# Altium PCB PCB_Hall_15mm.PcbDoc
Units mm, origin at the board's own origin, x right, y up, seen from the top; angles counter-clockwise.
Board outline 18.25 x 45 mm, 4 copper layers (Top Layer, Signal Layer 1, Signal Layer 2, Bottom Layer), stack 0.778 mm thick; 11 components, 15 nets, 63 pads, 13 vias.
Unrouted connection lines stored in the file: 22.
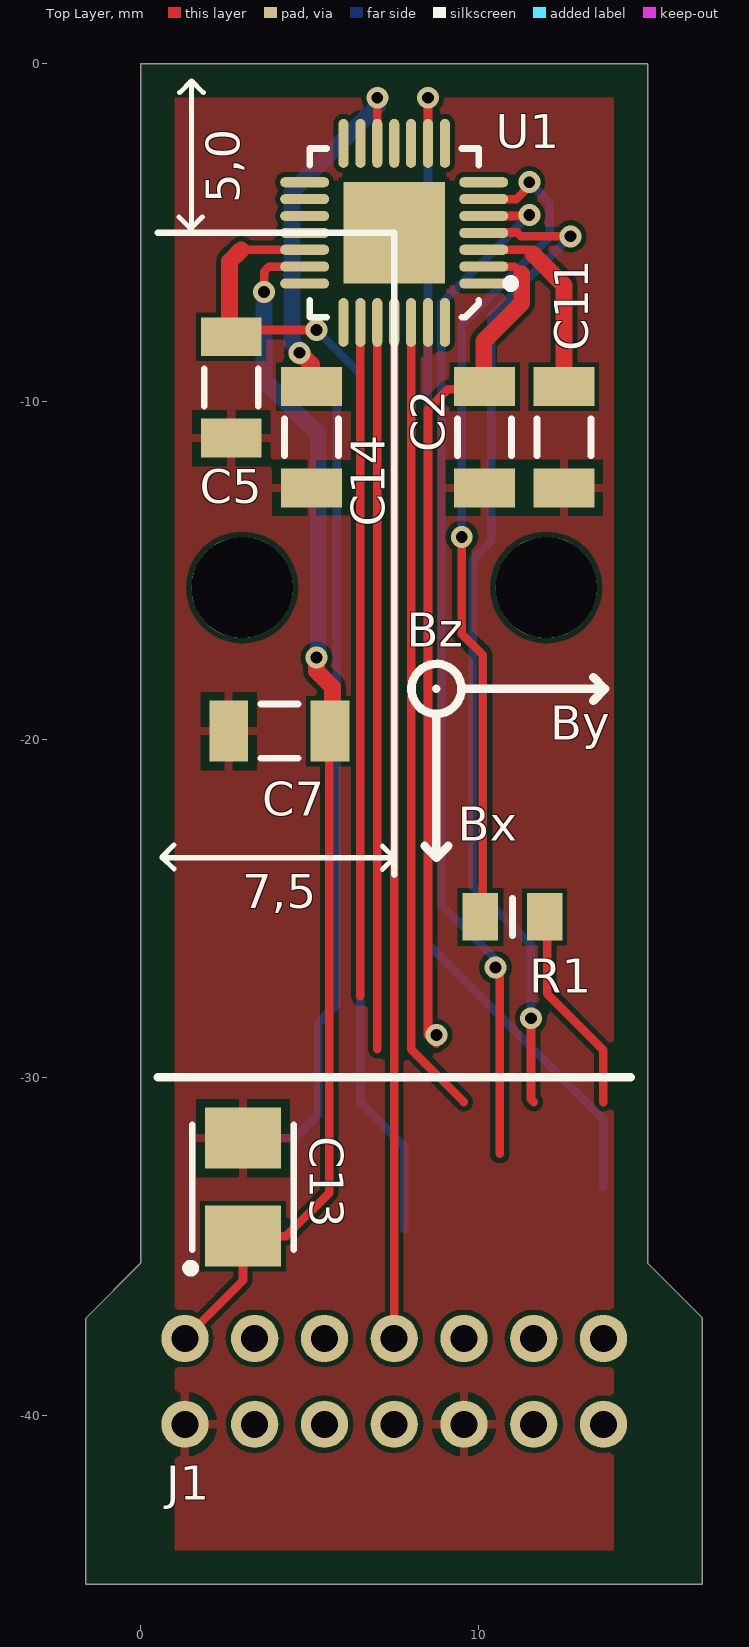
[diagram p0: Top Layer view]
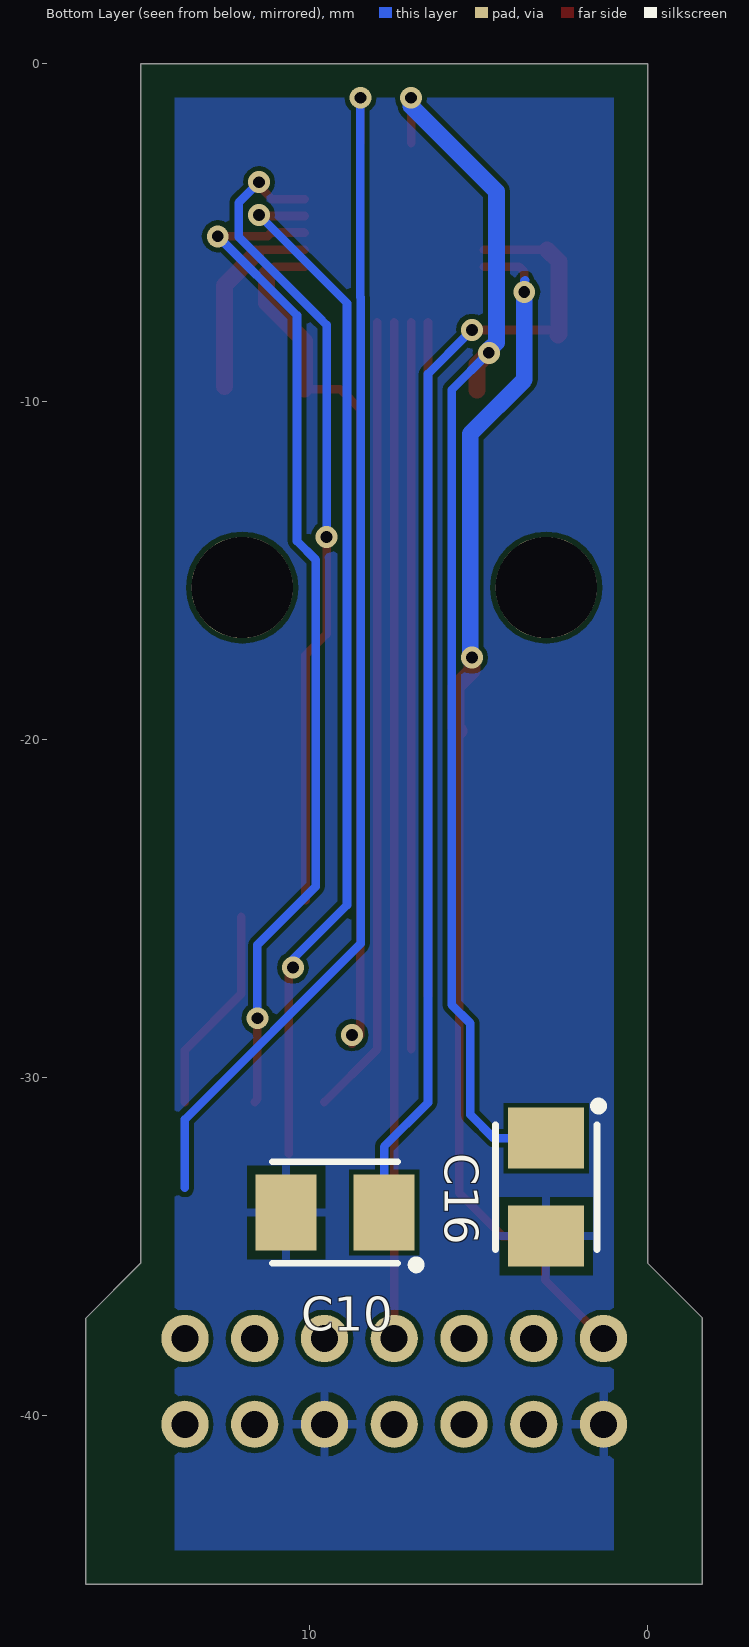
[diagram p1: Bottom Layer view, seen from below]
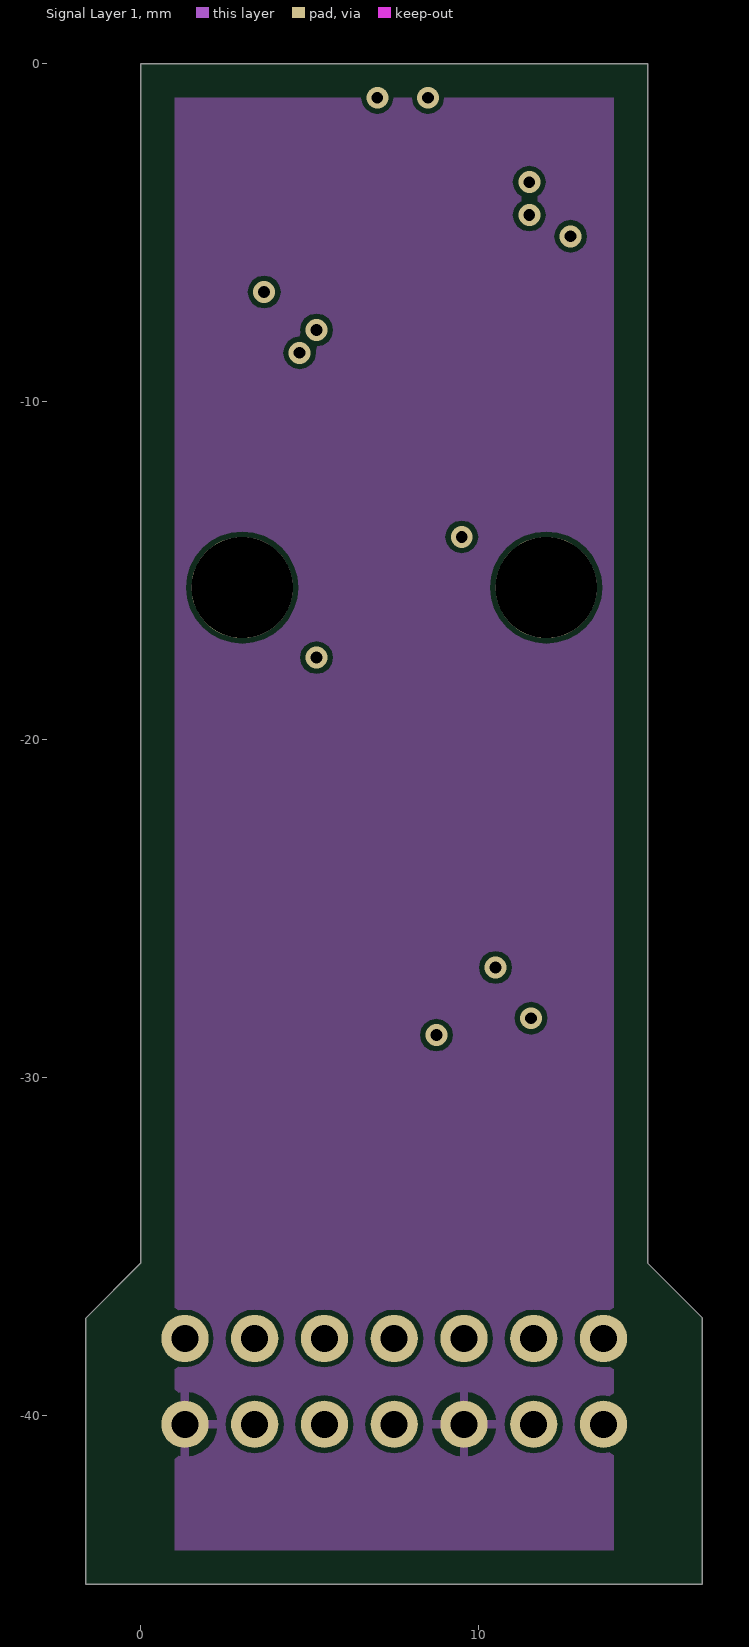
[diagram p2: Signal Layer 1]
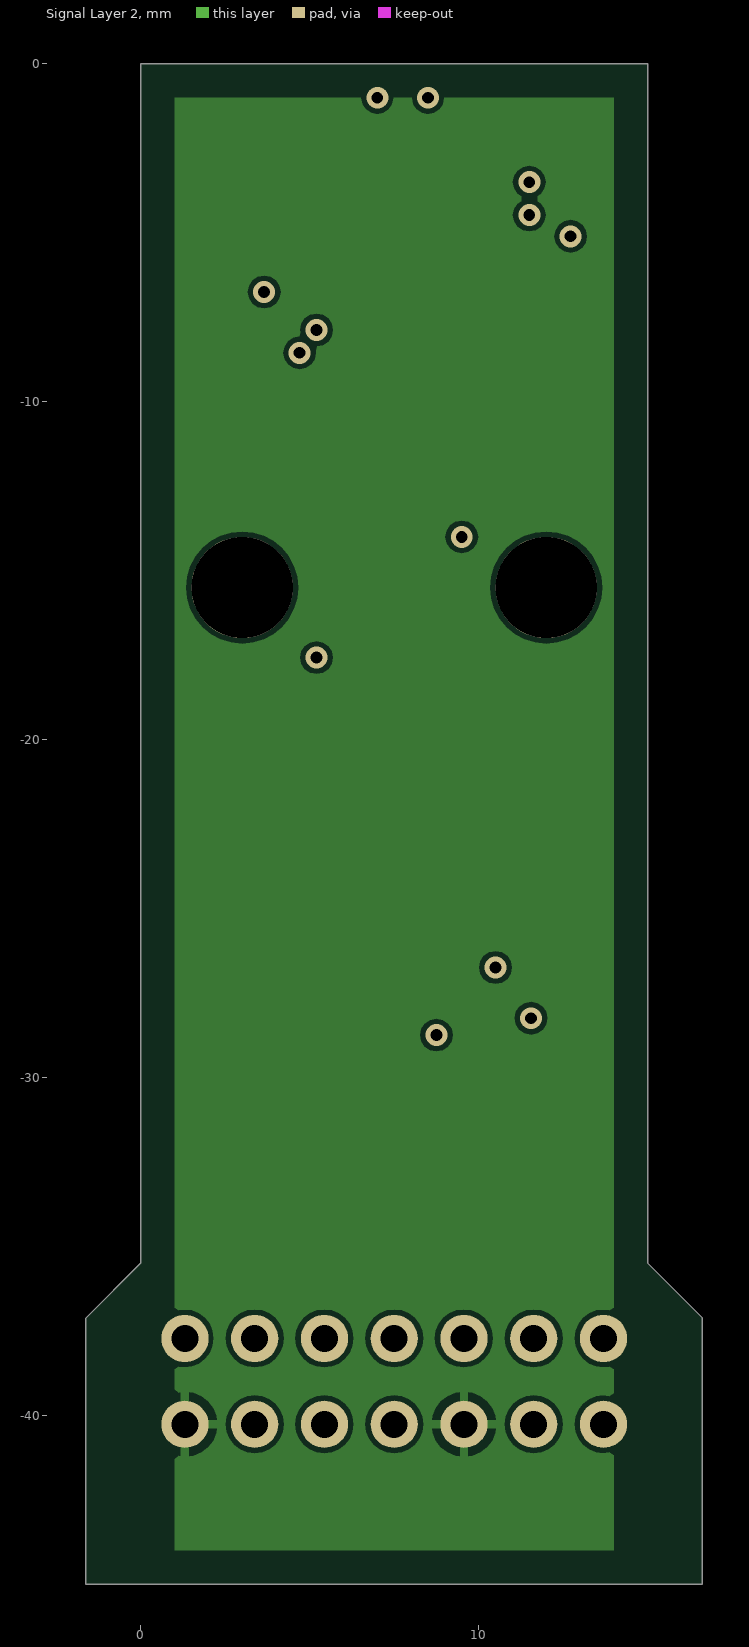
[diagram p3: Signal Layer 2]
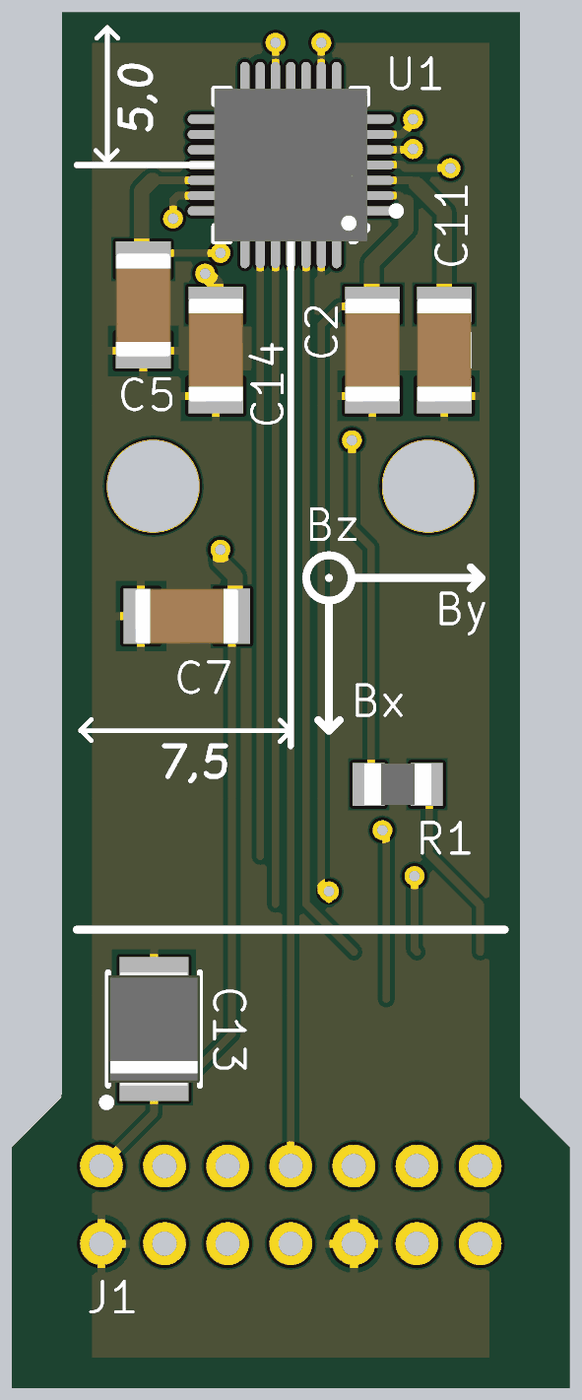
[diagram p4: 3D render of the assembled board from above, using the file's embedded part models]

## Layer stack, top to bottom
Top Solder: solder mask 0.0102, Solder Resist, Dk 3.5
Top Layer: signal copper 0.0356
Dielectric 1: core 0.254, FR-4, Dk 4.2
Signal Layer 1: signal copper 0.036
Dielectric 3: prepreg 0.127, Dk 4.2
Signal Layer 2: signal copper 0.036
Dielectric 2: core 0.254, Dk 4.2
Bottom Layer: signal copper 0.0356
Bottom Solder: solder mask 0.0102, Solder Resist, Dk 3.5

## Board outline
-1.625,-45 -1.625,-37.125 0,-35.5 0,0 15,0 15,-35.5 16.625,-37.125 16.625,-45

## Design rules (kind name [scope] priority, off if disabled: settings)
Clearance [All] p1: gap=0.15 ignorepadtopadclearanceinfootprint=FALSE except(0: Arc-Text Track-Text SMDPad-Text THPad-Text Via-Text Fill-Text Poly-Text Region-Text Text-Text)
HoleSize [All] p1: absolutevalues=TRUE maxlimit=20 minlimit=0.3 maxpercent=80.000 minpercent=20.000
MinimumSolderMaskSliver [All] p1 off: minsoldermaskwidth=0.254
PasteMaskExpansion [All] p1 off: expansion=0
PolygonConnect [All] p1: connectstyle=Relief reliefconductorwidth=0.254 reliefentries=4 polygonreliefangle="90 Angle" airgapwidth=0.254
RoutingCorners [All] p1: cornerstyle=45-Degree minsetback=0.5 maxsetback=2.54
RoutingTopology [InNetClass('All Nets')] p1: topology=Shortest
RoutingVias [All] p1: holewidth=0.35 width=0.55 viastyle="Through Hole" minholewidth=0.3 minwidth=0.45 maxholewidth=0.711 maxwidth=1.27
SilkToSilkClearance [All] p1 off: silktosilkclearance=0.254
SilkToSolderMaskClearance [IsPad] p1 off: minsilkscreentomaskgap=0.254 clearancetoexposedcopper=TRUE
SolderMaskExpansion [All] p1 off: expansion=0.102
UnRoutedNet [All] p1: checkbadconnections=TRUE
Width [All] p1: maxlimit=0.5 minlimit=0.15 preferedwidth=0.254 toplayer_prefwidth=0.2 midlayer1_minwidth=0.254 midlayer2_minwidth=0.254 midlayer2_maxwidth=0.254 bottomlayer_prefwidth=0.2 minimp=50.000000 maximp=50.000000 favimp=50.000000
22 further rules are at their usual default settings.

## Components (designator, comment, footprint, x,y, rotation, side; value= is the part's Value field where it differs from the comment)
C2 "0.1" CAPC3216X100N 10.175,-11.05 r90 top
C5 "0.1" CAPC3216X100N 2.675,-9.575 r270 top
C7 "0.1" CAPC3216X100N 4.1,-19.75 r180 top
C10 "=Value" CAPMP3528X120N 9.25,-34 r0 bottom
C11 "0.1" CAPC3216X100N 12.525,-11.05 r90 top
C13 "=Value" CAPMP3528X120N 3.025,-33.25 r90 top
C14 "0.1" CAPC3216X100N 5.05,-11.05 r90 top
C16 "=Value" CAPMP3528X120N 3,-33.25 r270 bottom
J1 "14 plated holles_closer" "14 Holes - closer" 7.5,-39 r0 top
R1 "1k" RESC2012X70N 11,-25.25 r0 top
U1 "Hall sensor" QFN50P500X500X100-29N-S325 7.5,-5 r180 top

## Footprints (in the part's own frame and the unit in brackets; to place one, negate y for a bottom-side part, rotate by r counter-clockwise, add the part's x,y. Pads: shape width x height; smd on the part's side, far side on the other; paste and mask are expansions set on the pad)
"14 Holes - closer" [mm]
  round 1.4 hole 0.8: 1(-6.195,-1.27) 2(-6.195,1.27) 3(-4.13,-1.27) 4(-4.13,1.27) 5(-2.065,-1.27) 6(-2.065,1.27) 7(0,-1.27) 8(0,1.27) 9(2.065,-1.27) 10(2.065,1.27) 11(4.13,-1.27) 12(4.13,1.27) 13(6.195,-1.27) 14(6.195,1.27)
CAPC3216X100N [mm] "Chip Capacitor, Body 3.2x1.6mm, IPC Medium Density"
  rect 1.15x1.8 smd: 1(-1.5,0) 2(1.5,0)
  silkscreen extent -0.55,-0.8 0.55,0.8, body extent -1.7,-0.9 1.7,0.9, height 0.94
CAPMP3528X120N [mm] "Capacitor, Polarized, Molded  Body 3.5x2.8mm, IPC Medium Density"
  rect 1.8x2.25 smd: 1(-1.45,0) 2(1.45,0)
  silkscreen extent -2.52,-1.5 1.85,1.67, body extent -1.85,-1.5 1.85,1.5, height 1.2
QFN50P500X500X100-29N-S325 [mm] "QFN, 0.50mm Pitch, Square; 28 pin, 5.00mm L X 5.00mm W X 1.00mm H body (w/thermal tab 3.25 X 3.25mm),  IPC Medium Density"
  oval 1.45x0.3 smd: 1(-2.65,1.5) 2(-2.65,1) 3(-2.65,0.5) 4(-2.65,0) 5(-2.65,-0.5) 6(-2.65,-1) 7(-2.65,-1.5) 15(2.65,-1.5) 16(2.65,-1) 17(2.65,-0.5) 18(2.65,0) 19(2.65,0.5) 20(2.65,1) 21(2.65,1.5)
  oval 0.3x1.45 smd: 8(-1.5,-2.65) 9(-1,-2.65) 10(-0.5,-2.65) 11(0,-2.65) 12(0.5,-2.65) 13(1,-2.65) 14(1.5,-2.65) 22(1.5,2.65) 23(1,2.65) 24(0.5,2.65) 25(0,2.65) 26(-0.5,2.65) 27(-1,2.65) 28(-1.5,2.65)
  rect 3x3 smd: 29(0,0)
  silkscreen extent -3.58,-2.5 2.5,2.5, body extent -2.5,-2.5 2.5,2.5, height 1
RESC2012X70N [mm] "Chip Resistor, EIA 0805, Metric 2012, Body 2.0x1.25mm, IPC Medium Density"
  rect 1.05x1.4 smd: 1(-0.95,0) 2(0.95,0)
  silkscreen extent 0,-0.55 0,0.55, body extent -1.1,-0.67 1.1,0.68, height 0.7

## Part data
C2 C5 C7 C11 C14: library part "Capacitor1206 - non polarized", "Non-polarised1206 capacitor", Dielectric type=X5R, SMD Solders=2, SolderOption=0, THD Solders=0, Vendor=any
C10 C13 C16: library part "Capacitor - polarized", "Polarised capacitor", SMD Solders=2, SolderOption=0, THD Solders=0
R1: library part "Resistor - 5%", "Resistor - 5%", Tolerance=5%, SMD Solders=2, SolderOption=0, THD Solders=0, TK=1000ppmC^(-1), Vendor=any

## Free pads (board coordinates)
  round 3 hole 3: 1(3,-15.5) 2(12,-15.5)

## Via types
v1: diameter 0.65, hole 0.35, Top Layer to Bottom Layer, 13 vias

## Nets (pads, with @x,y where several pads share a name; then routed paths per layer and width w, separated by ;. In a path a pad name is that pad's centre, name@x,y a point inside that pad or via, vN(x,y) a via of type N, cw(c..) or ccw(c..) an arc to the next point about the centre after c; other vN are vias at no path point)
"5V Hall": C7.1 C13.1 J1.2 U1.20 | length 36.8
  Top Layer w0.254: J1.2 3.025,-36.01 C13.1 4.3,-34.7 5.575,-33.425 C7.1@5.575,-19.75 ; v1(3.65,-6.75) 3.65,-6.145 3.795,-6 U1.20
  Top Layer w0.5: v1(5.2,-17.575) 5.2,-17.975 5.675,-18.45 5.675,-19.65 5.575,-19.75 C7.1
  Bottom Layer w0.254: 3.625,-6.4 3.65,-6.425 v1(3.65,-6.75)
  Bottom Layer w0.5: v1(3.65,-6.75) 3.65,-9.35 5.25,-10.95 5.25,-17.625 v1(5.2,-17.575)
CS1: J1.13 U1.9 | length 35.8
  Top Layer w0.254: U1.9 8.5,-1.5 ; 8.5,-1.45 v1(8.5,-1)
  Bottom Layer w0.254: v1@8.5,-0.9 v1(8.5,-1) 8.5,-6.904 8.494,-6.91 8.494,-26.045 13.695,-31.246 13.695,-33.27
GND: C2.1 C5.2 C7.2 C10.2 C11.1 C13.2 C14.1 C16.2 J1.1 J1.9 U1.13 U1.27
MCLK: J1.12 U1.4 | length 30.2
  Top Layer w0.254: U1.4 10.162,-4.988 11.137,-4.988 11.245,-5.096 12.717,-5.096 v1(12.723,-5.102) v1@12.748,-5.102 ; v1(11.55,-28.25) 11.55,-30.65 11.63,-30.73
  Bottom Layer w0.254: v1(11.55,-28.25) 11.55,-26.075 9.825,-24.35 9.825,-14.675 10.377,-14.123 10.377,-7.448 v1(12.723,-5.102)
MISO: R1.1 U1.6 | length 24.5
  Top Layer w0.254: v1(9.5,-14) 9.5,-16.875 10.125,-17.5 R1.1@10.125,-24.75 ; U1.6 11.117,-4 11.5,-3.617 v1(11.5,-3.5)
  Bottom Layer w0.254: v1(9.5,-14) 9.5,-7.726 9.75,-7.475 ; 9.75,-7.475 12.103,-5.122 12.103,-4.103 v1(11.5,-3.5)
MOSI: J1.11 U1.5 | length 31.2
  Top Layer w0.254: U1.5 11.476,-4.5 v1(11.501,-4.475) ; v1(10.5,-26.75) 10.625,-26.625 10.625,-32.265
  Bottom Layer w0.254: v1(10.5,-26.75) 10.5,-26.5 8.898,-24.898 8.898,-7.078 v1(11.501,-4.475)
NetC5_1: C5.1 C10.1 U1.19 | length 35.1
  Top Layer w0.254: C5.1 2.875,-7.875 v1(5.2,-7.875) ; 2.973,-5.5 U1.19
  Top Layer w0.5: C5.1@2.65,-8.025 2.625,-8 2.625,-5.848 2.973,-5.5
  Bottom Layer w0.254: C10.1@7.8,-34.5 C10.1 7.8,-32.05 6.5,-30.75 6.5,-9.175 v1@5.35,-8.025 ; v1@5.35,-8.025 v1(5.2,-7.875) 5.2,-7.85 5.35,-8 v1@5.35,-8.025
NetC11_2: C11.2 U1.3 | length 5.8
  Top Layer w0.2: 11.475,-5.5 11.604,-5.629
  Top Layer w0.254: U1.3 11.475,-5.5
  Top Layer w0.5: 11.604,-5.629 12.525,-6.55 C11.2
NetC14_2: C14.2 C16.1 U1.12 | length 37.2
  Top Layer w0.254: v1@4.7,-8.675 v1(4.7,-8.55) ; U1.12 v1(7,-1)
  Top Layer w0.5: v1(4.7,-8.55) 5.05,-8.9 C14.2 C14.2@5.05,-9.65
  Bottom Layer w0.254: C16.1 4.551,-31.8 5.25,-31.101 5.25,-28.4 5.802,-27.848 5.802,-9.652 v1(4.7,-8.55) ; v1@7,-1.25 v1(7,-1)
  Bottom Layer w0.5: v1(4.7,-8.55) 4.7,-8.476 4.475,-8.25 4.475,-3.775 v1@7,-1.25
NetJ1_14: J1.14 R1.2 | length 6.2
  Top Layer w0.254: R1.2@12.025,-25.25 12.025,-27.525 13.695,-29.195 13.695,-30.73
V1temp: J1.10 U1.26 | length 23.7
  Top Layer w0.254: U1.26 8,-29.165 9.565,-30.73
V1x: J1.6 U1.24 | length 21.5
  Top Layer w0.254: 7,-29.165 U1.24
V1y: J1.4 U1.23 | length 19.9
  Top Layer w0.254: 6.5,-27.6 U1.23
V1z: J1.8 U1.25 | length 30.1
  Top Layer w0.254: J1.8 7.5,-30.73 U1.25
Vref1: C2.2 J1.3 J1.5 J1.7 U1.2 | length 26.1
  Top Layer w0.254: v1(8.75,-28.75) 8.75,-29 8.5,-28.75 8.5,-10.225 9.1,-9.625 C2.2@10.15,-9.625 ; U1.2 11.056,-6 11.275,-6.219
  Top Layer w0.5: C2.2@10.15,-9.625 10.15,-8.2 11.275,-7.075 11.275,-6.219
pads on no net: U1.1 U1.7 U1.8 U1.10 U1.11 U1.14 U1.15 U1.16 U1.17 U1.18 U1.21 U1.22 U1.28 U1.29

## Polygon pours and split planes (outlines as drawn)
GND on Bottom Layer "Bottom Layer-GND" (solid, pour order 4): 1,-1 14,-1 14,-44 1,-44
GND on Top Layer "Top Layer-GND" (solid, pour order 6): 1,-1 14,-1 14,-44 1,-44
GND on Signal Layer 1 (solid, pour order 8): 1,-1 14,-1 14,-44 1,-44
GND on Signal Layer 2 (solid, pour order 10): 1,-1 14,-1 14,-44 1,-44

## Silkscreen, mask and mechanical layers (free items; w line width, h text height)
Top Overlay:
  circle w0.254: c8.75,-18.5 r0
  circle w0.254: c8.75,-18.5 r0.74
  lines w0.15: 0.625,-23.5 7.5,-23.5 ; 0.975,-23.825 0.625,-23.475 0.975,-23.125 ; 1.125,-4.525 1.475,-4.875 ; 1.15,-0.85 1.5,-0.5 ; 1.825,-4.525 1.475,-4.875 ; 1.85,-0.85 1.5,-0.5 ; 7.15,-23.85 7.5,-23.5 ; 7.15,-23.15 7.5,-23.5 ; 9.5,-18.5 11.275,-18.5 ; 1.475,-4.875 1.5,-4.875 1.5,-0.5
  lines w0.2: 0.5,-5 7.5,-5 7.5,-24
  lines w0.254: 0.5,-30 14.5,-30 ; 8.4,-23.15 8.75,-23.5 ; 8.75,-19.25 8.75,-23.5 ; 9.1,-23.15 8.75,-23.5 ; 9.49,-18.5 13.74,-18.5 ; 13.39,-18.85 13.74,-18.5 ; 13.39,-18.15 13.74,-18.5
  text "5,0" at 2.925,-4.125 h1 r90
  text "Bz" at 7.875,-17.25 h1
  text "By" at 12.125,-20 h1
  text "Bx" at 9.375,-23 h1
  text "7,5" at 3,-25 h1
Mechanical 5:
  lines w0.254: 15,0 15,-35.5 16.625,-37.125 16.625,-45 -1.625,-45 -1.625,-37.125 0,-35.5 0,0 15,0 ; 15,0 15,0 ; 15,0 15,0

## Dimensions
7.5,-5 to 15,0 on Mechanical 5
7.5,-5 to 0,0 on Mechanical 5